# EAGLE board femto (EAGLE 6.4)
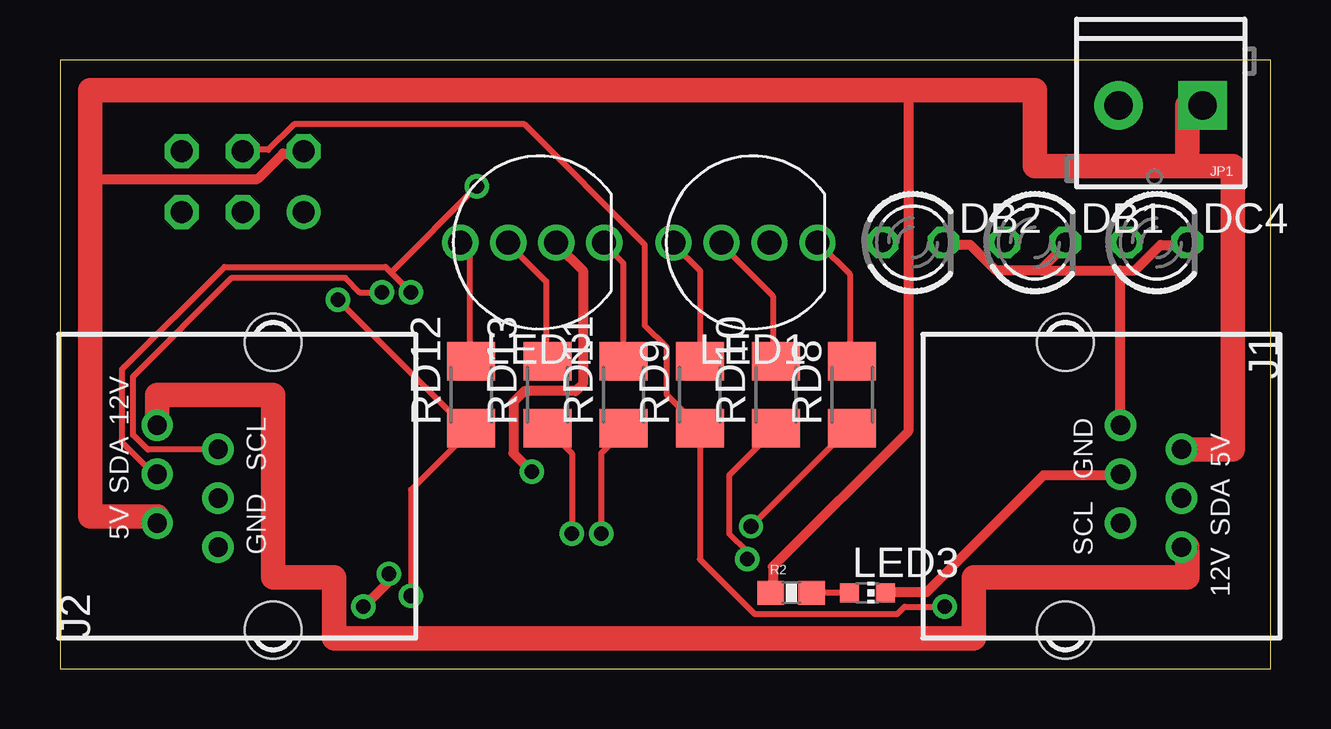
[diagram p0: board, top side]
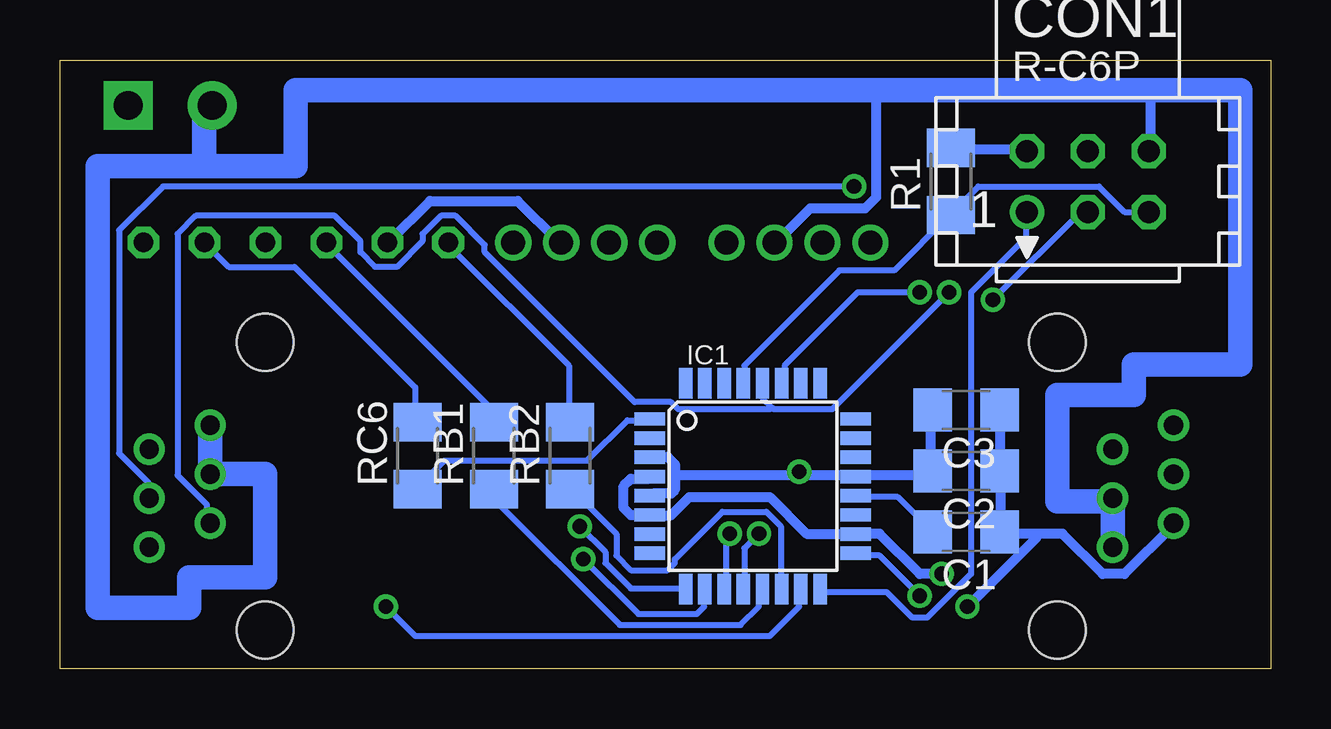
[diagram p1: board, bottom side, seen from below]

Size 50.47 x 25.39 mm. Coordinates in mm from the lower left corner, seen from the top.
Outline: 0,0 50.47,0 50.47,25.39 0,25.39 0,0
Copper layers (1*16): Top 0.035mm / dielectric 1.5mm / Bottom 0.035mm
Design rules "default": minimum track width 10mil, minimum drill 24mil, track to track 8mil, track to pad 8mil, pad to pad 8mil, via to via 8mil, smd to smd 8mil, copper to edge 8mil, drill to drill 8mil, minimum pad ring 10mil, minimum via ring 8mil, stop-mask expansion 4mil, vias tented up to drill 0mil, thermal gap 10mil
Net classes: 1 power: width 0.406 mm
vRestrict: area 15.2,1.3 to 19.1,14; area 24.1,1.3 to 27.9,14; area 15.2,1.3 to 27.9,5.1; area 15.2,10.2 to 27.9,14

## Footprints (pad centres in the part's own frame; a part is rotated, then mirrored left to right if it is on the bottom)
C1206 = smd 1.6 x 1.8: 1 -1.4,0; 2 1.4,0
TINYISP = drill 0.914 octagon: GND 2.54,1.27; MOSI 0,1.27; RESET 2.54,-1.27; SCK 0,-1.27; VCC -2.54,1.27 | drill 0.914: MISO -2.54,-1.27
LED3MM = drill 0.813 octagon: A -1.27,0; K 1.27,0
TQFP32-08 = smd 1.27 x 0.559: 1 -4.293,2.8; 2 -4.293,2; 3 -4.293,1.2; 4 -4.293,0.4; 5 -4.293,-0.4; 6 -4.293,-1.2; 7 -4.293,-2; 8 -4.293,-2.8; 17 4.293,-2.8; 18 4.293,-2; 19 4.293,-1.2; 20 4.293,-0.4; 21 4.293,0.4; 22 4.293,1.2; 23 4.293,2; 24 4.293,2.8 | smd 0.559 x 1.27: 9 -2.8,-4.293; 10 -2,-4.293; 11 -1.2,-4.293; 12 -0.4,-4.293; 13 0.4,-4.293; 14 1.2,-4.293; 15 2,-4.293; 16 2.8,-4.293; 25 2.8,4.293; 26 2,4.293; 27 1.2,4.293; 28 0.4,4.293; 29 -0.4,4.293; 30 -1.2,4.293; 31 -2,4.293; 32 -2.8,4.293
RJ12-RIGHTANGLE-I2C = drill 0.8 pad 1.3: +5V -1.54,4.84; +12V 2.54,4.84; GND1 -2.54,2.3; GND2 -0.5,2.3; SCL 1.54,2.3; SDA 0.5,4.84 | hole 2.36: -6,0; 6,0
SCREWTERMINAL-3.5MM-2 = drill 1.2 pad 2.032 square: 1 0,0 | drill 1.2 pad 2.032: 2 3.5,0
LED-TRICOLOR-THROUGHHOLE = drill 1: BLU 3,0; GND -1,0; GRN 1,0; RED -3,0
CHIP-LED0603 = smd 0.8 x 0.8: A 0,-0.75; C 0,0.75
M1206 = smd 1.6 x 2: 1 -1.4,0; 2 1.4,0
0603-RES = smd 1.1 x 1: 1 -0.85,0; 2 0.85,0

## Placement (x,y rotation side)
C1  0.1uF  [C1206]  12.7,5.71 180 bottom
C2  0.1uF  [C1206]  12.7,8.26 180 bottom
C3  10uF  [C1206]  12.7,10.79 180 bottom
CON1  [TINYISP]  7.62,20.32 0 bottom
DB1  [LED3MM]  40.64,17.78 0 top
DB2  [LED3MM]  35.56,17.78 0 top
DC4  [LED3MM]  45.72,17.78 0 top
IC1  MEGA8-AI  [TQFP32-08]  21.59,7.62 0 bottom
J1  RJ12RIGHTANGLE-I2C  [RJ12-RIGHTANGLE-I2C]  41.91,7.62 270 top
J2  RJ12RIGHTANGLE-I2C  [RJ12-RIGHTANGLE-I2C]  8.89,7.62 90 top
JP1  [SCREWTERMINAL-3.5MM-2]  47.62,23.5 180 top
LED1  RGB-COMMON-CATHODE  [LED-TRICOLOR-THROUGHHOLE]  28.57,17.78 180 top
LED2  RGB-COMMON-CATHODE  [LED-TRICOLOR-THROUGHHOLE]  19.68,17.78 180 top
LED3  [CHIP-LED0603]  33.66,3.17 270 top
R1  10k  [M1206]  13.34,20.32 90 bottom
R2  10k  [0603-RES]  30.48,3.17 0 top
RB1  1k  [M1206]  32.38,8.89 90 bottom
RB2  1k  [M1206]  29.21,8.89 90 bottom
RC6  1k  [M1206]  35.56,8.89 90 bottom
RD8  1k  [M1206]  33.02,11.43 90 top
RD9  1k  [M1206]  26.67,11.43 90 top
RD10  1k  [M1206]  29.84,11.43 90 top
RD11  1k  [M1206]  23.5,11.43 90 top
RD12  1k  [M1206]  17.14,11.43 90 top
RD13  1k  [M1206]  20.32,11.43 90 top

## Library data of the parts
C1-C3 R1 RB1 RB2 RC6 RD8-RD13 = resistor
CON1 = lpatiny; OC_FARNELL: unknown; OC_NEWARK: unknown
DB1 DB2 DC4 = led
IC1 = atmel; MPN: ATMEGA8-16AU; OC_FARNELL: 9171371; OC_NEWARK: 73M8863
J1 J2 LED1 LED2 = lpatiny
JP1 R2 = SparkFun
LED3 = adafruit

## Nets
+5V [power]: C1.1 C2.1 C3.1 CON1.VCC IC1.4 IC1.6 IC1.18 J1.+5V J2.+5V JP1.1 R1.2 R2.1
B0: IC1.12 RD13.1
D5: IC1.9 RD8.1
D6: IC1.10 RD10.1
D7: IC1.11 RD11.1
GND [power]: C2.2 C3.2 CON1.GND DB1.K DB2.K DC4.K IC1.3 IC1.5 IC1.21 J1.GND1 J1.GND2 J2.GND1 J2.GND2 JP1.2 LED1.GND LED2.GND LED3.C
MISO: CON1.MISO IC1.16
MOSI: CON1.MOSI IC1.15 RD9.1
N$1: LED1.RED RD8.2
N$2: IC1.24
N$3: IC1.23
N$4: C1.2 IC1.20
N$5: IC1.26
N$6: IC1.25
N$7: LED1.BLU RD9.2
N$8: LED1.GRN RD10.2
N$9: IC1.30
N$10: IC1.31
N$11: IC1.1 RC6.1
N$12: IC1.32
N$13: J1.+12V J2.+12V
N$14: IC1.2
N$15: LED3.A R2.2
N$18: IC1.13 RB1.1
N$19: IC1.14 RB2.1
N$20: LED2.RED RD11.2
N$21: LED2.BLU RD12.2
N$22: LED2.GRN RD13.2
N$23: DC4.A RC6.2
N$40: DB1.A RB1.2
N$41: DB2.A RB2.2
RESET: CON1.RESET IC1.29 R1.1
SCK: CON1.SCK IC1.17 RD12.1
SCL: IC1.28 J1.SCL J2.SCL
SDA: IC1.27 J1.SDA J2.SDA

## Tracks (layer width: path | path; a pad name or v marks a point on that pad's centre or on a via)
+5V  (via drill 0.61)
  Top 0.406: 35.36,24.13 35.36,9.91 29.72,4.27 29.72,3.2 R2.1 | 1.27,20.42 8.23,20.42 9.3,21.49 10.06,21.49 CON1.VCC | v13.72,3.96 13.72,3.66 v12.65,2.59
  Top 1.016: J1.+5V 48.9,9.16 48.9,20.95 46.99,20.95 | 46.99,20.95 40.64,20.95 40.64,24.13 35.36,24.13 1.27,24.13 1.27,20.42 1.27,6.35 4.05,6.35 J2.+5V | JP1.1 46.99,23.5 46.99,20.95
  Bottom 0.406: IC1.4 25.91,7.92 26.67,7.92 26.98,7.62 26.98,6.71 26.67,6.4 26.06,6.4 IC1.6 25.76,6.4 24.99,6.4 24.23,7.16 20.88,7.16 19.36,5.64 17.37,5.64 IC1.18 17.22,5.64 16.31,5.64 14.63,3.96 v13.72,3.96 | R1.2 13.26,21.64 10.21,21.64 CON1.VCC | C3.1 11.28,10.67 11.28,8.38 C2.1 11.28,8.23 11.28,5.79 C1.1 11.12,5.64 9.75,5.64 | 9.75,5.64 8.69,5.64 7.01,3.96 6.1,3.96 4.12,5.94 J2.+5V | v12.65,2.59 9.75,5.49 9.75,5.64
B0  (via drill 0.61)
  Top 0.254: v21.34,5.64 21.34,8.99 20.42,9.91 RD13.1
  Bottom 0.254: v21.34,5.64 21.95,5.03 21.95,3.35 IC1.12
D5  (via drill 0.61)
  Top 0.254: v28.8,5.94 32.92,10.06 RD8.1
  Bottom 0.254: v28.8,5.94 27.74,4.88 27.74,4.42 26.67,3.35 24.54,3.35 IC1.9
D6  (via drill 0.61)
  Top 0.254: v28.65,4.57 28.65,4.88 27.89,5.64 27.89,8.08 29.72,9.91 RD10.1
  Bottom 0.254: v28.65,4.57 26.36,2.29 23.93,2.29 23.62,2.59 23.62,3.2 IC1.10
D7  (via drill 0.61)
  Top 0.254: v22.55,5.64 22.55,8.99 23.47,9.91 RD11.1
  Bottom 0.254: v22.55,5.64 22.71,5.49 22.71,3.35 IC1.11
GND  (via drill 0.61)
  Top 0.406: 40.84,16.61 39.01,16.61 37.95,17.68 36.88,17.68 DB2.K | 40.84,16.61 41.91,17.68 DB1.K | 40.84,16.61 44.2,16.61 | 44.2,16.61 44.81,16.61 45.87,17.68 46.94,17.68 DC4.K | LED3.C 34.44,3.2 36.12,3.2 41,8.08 44.2,8.08 J1.GND2 | v19.66,8.23 18.9,8.99 18.9,11.12 19.36,11.58 21.49,11.58 21.79,11.89 21.79,16.61 20.73,17.68 LED2.GND | 44.2,16.61 44.2,10.21 J1.GND1
  Bottom 0.406: LED1.GND 29.72,17.83 31.39,19.51 35.05,19.51 36.73,17.83 DB2.K | 25.91,7.16 IC1.5 25.76,7.32 24.99,7.32 24.84,7.47 24.84,8.08 | 24.84,8.08 24.84,8.53 25.15,8.84 25.76,8.84 IC1.3 | 17.37,8.08 IC1.21 | IC1.21 17.22,8.08 14.33,8.08 14.17,8.23 C2.2 14.17,8.38 14.17,10.67 C3.2 | 19.66,8.08 17.53,8.08 IC1.21 | 19.66,8.08 24.84,8.08 | 5.03,24.13 5.03,21.64 CON1.GND | 16.46,24.13 16.46,19.66 16.92,19.2 19.2,19.2 20.57,17.83 LED2.GND | v19.66,8.23 19.66,8.08
  Bottom 1.016: 44.45,20.95 48.9,20.95 48.9,2.54 45.09,2.54 45.09,3.81 41.91,3.81 41.91,8.12 J1.GND2 J1.GND1 | 44.45,20.95 40.64,20.95 40.64,24.13 16.46,24.13 5.03,24.13 1.27,24.13 1.27,12.7 5.71,12.7 5.71,11.43 8.89,11.43 8.89,6.99 6.59,6.99 | 6.59,6.99 J2.GND2 | JP1.2 44.45,23.5 44.45,20.95 | 6.59,6.99 J2.GND1
MISO
  Bottom 0.254: IC1.16 18.75,3.2 16,3.2 14.94,2.13 14.33,2.13 12.5,3.96 12.5,15.7 10.21,17.98 10.21,19.05 CON1.MISO
MOSI  (via drill 0.61)
  Top 0.254: v36.88,2.59 35.2,2.59 34.9,2.29 28.96,2.29 26.67,4.57 RD9.1 26.67,10.06 25.3,11.43 25.3,13.41 24.38,14.33 24.38,17.68 19.36,22.71 9.75,22.71 8.69,21.64 7.62,21.64 CON1.MOSI
  Bottom 0.254: v36.88,2.59 35.66,1.37 20.88,1.37 19.66,2.59 19.66,3.2 IC1.15
N$1
  Top 0.254: RD8.2 32.92,12.95 32.92,16.46 31.7,17.68 LED1.RED
N$4
  Bottom 0.254: IC1.20 17.22,7.16 15.54,7.16 14.17,5.79 C1.2
N$7
  Top 0.254: RD9.2 26.67,16.61 25.6,17.68 LED1.BLU
N$8
  Top 0.254: RD10.2 29.72,12.95 29.72,15.54 27.58,17.68 LED1.GRN
N$11
  Bottom 0.254: IC1.1 25.91,10.36 26.82,10.36 28.5,8.69 34.44,8.69 35.51,7.62 RC6.1
N$13
  Top 1.016: J1.+12V 46.99,5.08 46.99,3.81 38.1,3.81 38.1,1.27 11.43,1.27 11.43,3.81 8.89,3.81 8.89,11.43 4.05,11.43 J2.+12V
N$15
  Top 0.254: LED3.A 32.77,3.2 31.39,3.2 R2.2
N$18
  Bottom 0.254: IC1.13 21.34,3.2 21.34,2.59 22.1,1.83 27.13,1.83 32.31,7.01 32.31,7.47 RB1.1
N$19
  Bottom 0.254: IC1.14 20.42,3.35 20.42,5.94 21.03,6.55 22.86,6.55 24.84,4.57 24.84,4.42 25.15,4.12 26.67,4.12 27.28,4.72 27.28,5.64 29.11,7.47 RB2.1
N$20
  Top 0.254: RD11.2 23.47,12.95 23.47,16.92 22.71,17.68 LED2.RED
N$21
  Top 0.254: RD12.2 17.07,12.95 17.07,17.37 16.76,17.68 LED2.BLU
N$22
  Top 0.254: RD13.2 20.27,12.95 20.27,16.15 18.75,17.68 LED2.GRN
N$23
  Bottom 0.254: DC4.A 43.43,16.76 40.69,16.76 35.66,11.73 35.66,10.36 RC6.2
N$40
  Bottom 0.254: RB1.2 32.46,10.36 32.46,10.82 39.32,17.68 DB1.A
N$41
  Bottom 0.254: RB2.2 29.26,10.36 29.26,12.65 34.29,17.68 DB2.A
RESET
  Bottom 0.254: IC1.29 21.95,12.04 21.95,12.65 17.98,16.61 15.7,16.61 13.41,18.9 R1.1 13.26,19.05 12.19,20.12 7.16,20.12 6.1,19.05 CON1.RESET
SCK  (via drill 0.61)
  Top 0.254: v14.63,3.05 14.63,7.47 17.07,9.91 | 17.07,9.91 v11.58,15.39 | 17.07,9.91 RD12.1
  Bottom 0.254: v14.63,3.05 16.31,4.72 17.22,4.72 IC1.17 | CON1.SCK 7.92,19.05 v11.58,15.39
SCL  (via drill 0.61)
  Top 0.254: v13.41,15.7 12.5,15.7 11.89,16.31 7.16,16.31 3.05,12.19 3.05,9.75 3.66,9.14 6.55,9.14 J2.SCL
  Bottom 0.254: 20.8,10.9 20.73,10.82 18.29,10.82 v13.41,15.7 | 20.8,10.9 21.18,11.28 21.18,11.89 IC1.28 | J1.SCL 44.35,6.1 44.35,6.86 45.57,8.08 45.57,18.14 44.81,18.9 39.01,18.9 37.95,17.83 37.95,17.37 37.34,16.76 36.42,16.76 35.36,17.83 35.36,18.14 34.59,18.9 33.98,18.9 32.77,17.68 32.77,17.37 26.52,11.12 24.99,11.12 24.69,10.82 20.88,10.82 20.8,10.9
SDA  (via drill 0.61)
  Top 0.254: 13.79,16.54 13.56,16.76 6.86,16.76 2.59,12.5 2.59,9.45 3.96,8.08 J2.SDA | 13.79,16.54 v14.63,15.7 | 13.79,16.54 v17.37,20.12
  Bottom 0.254: v14.63,15.7 17.22,15.7 20.27,12.65 20.27,12.04 IC1.27 | v17.37,20.12 46.18,20.12 48.01,18.29 48.01,8.99 46.79,7.77 46.79,7.16 J1.SDA